# Altium PCB dolinepcb.PcbDoc
Units mil, origin at the board's own origin, x right, y up, seen from the top; angles counter-clockwise.
Board outline 3070 x 3025 mil, 2 copper layers (Top Layer, Bottom Layer); 28 components, 37 nets, 131 pads, 4 vias.
Unrouted connection lines stored in the file: 2.
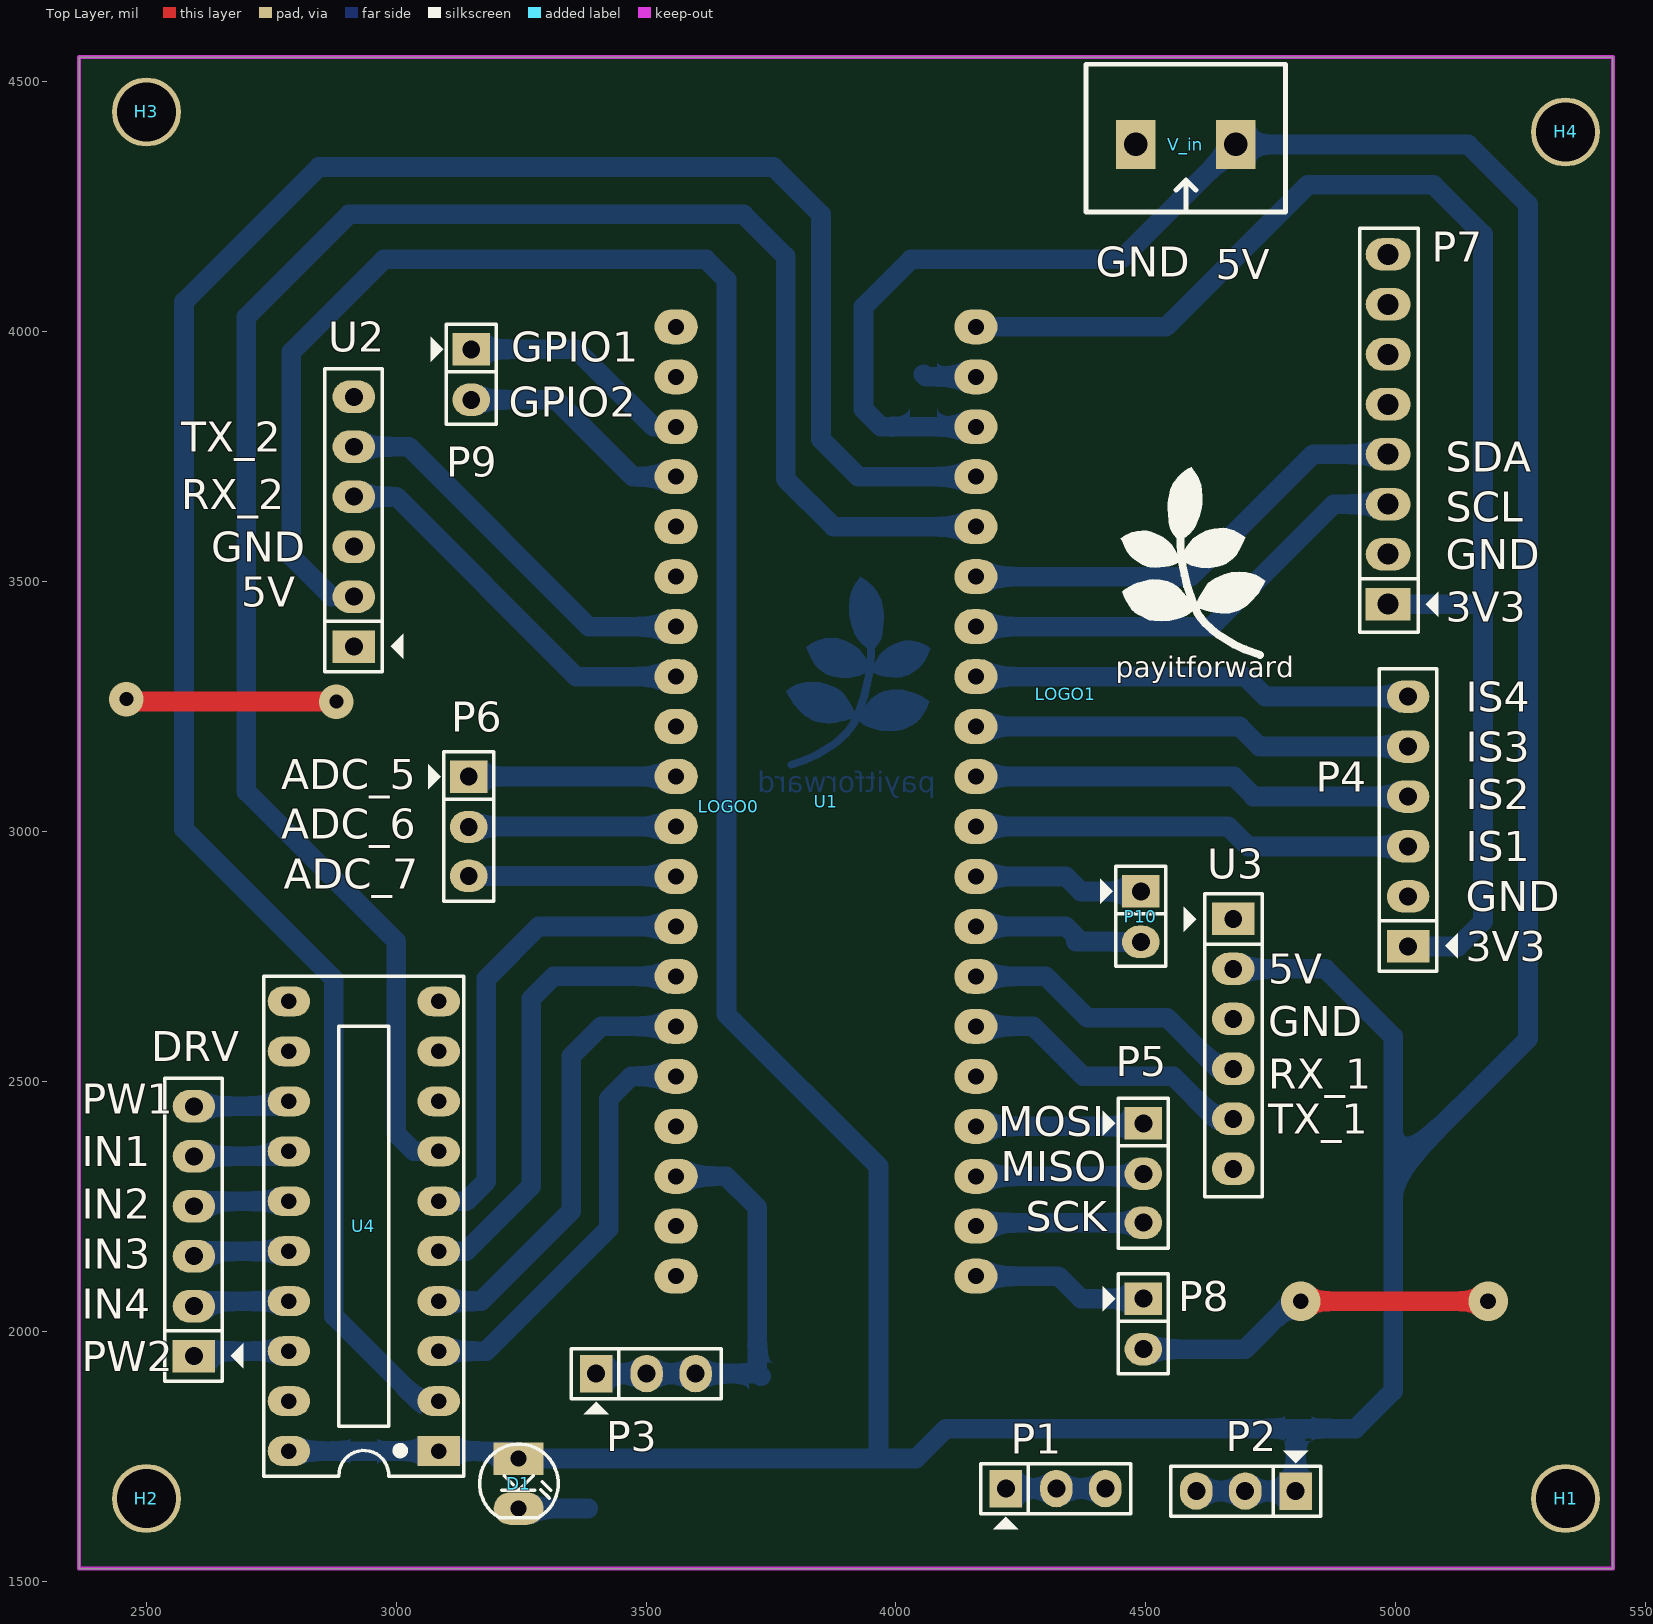
[diagram p0: Top Layer view]
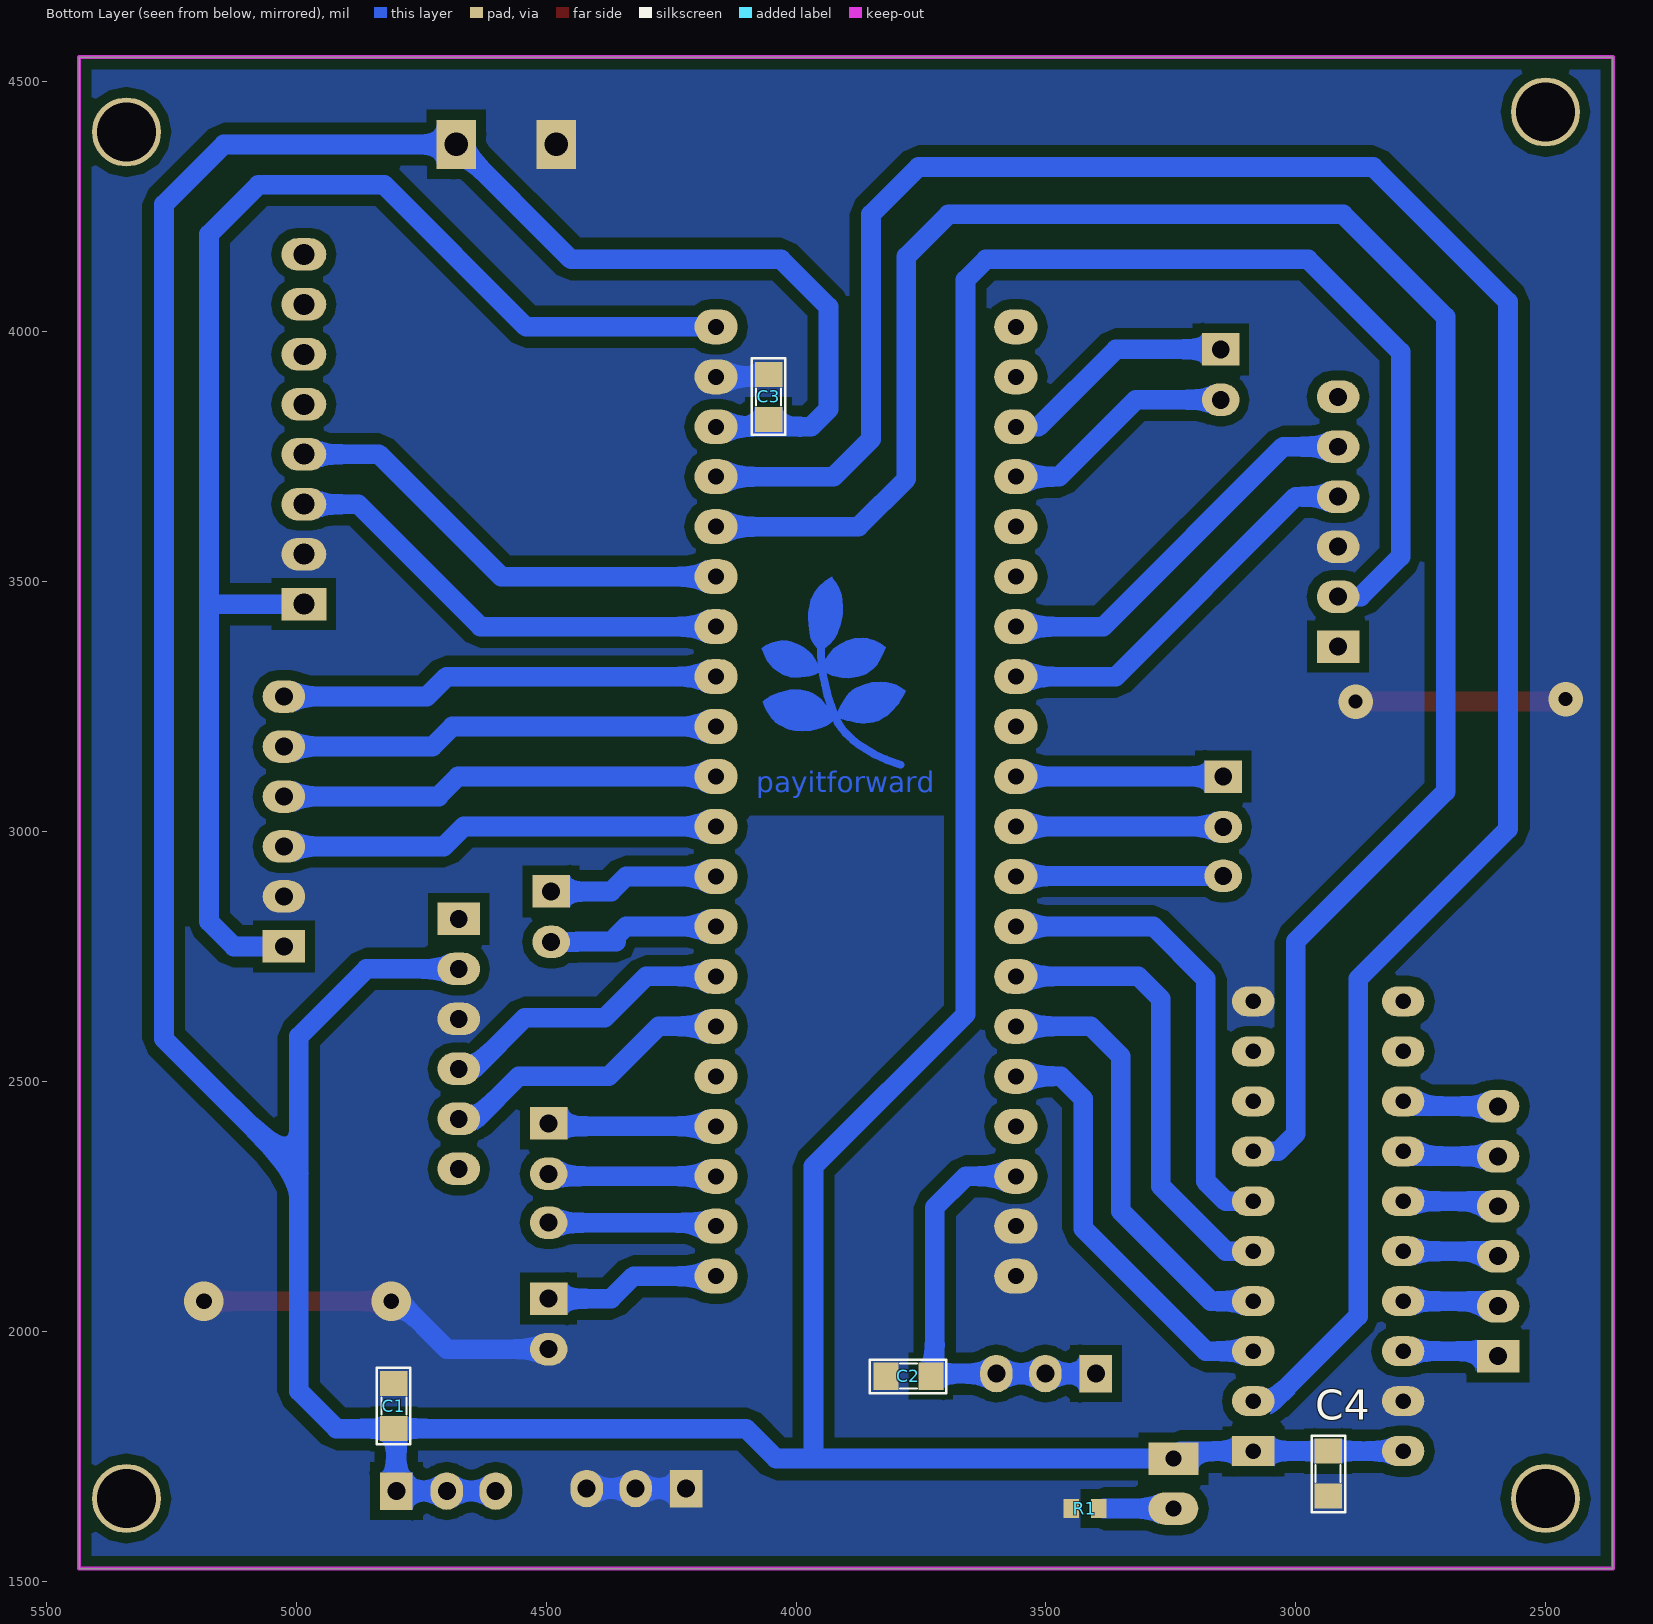
[diagram p1: Bottom Layer view, seen from below]
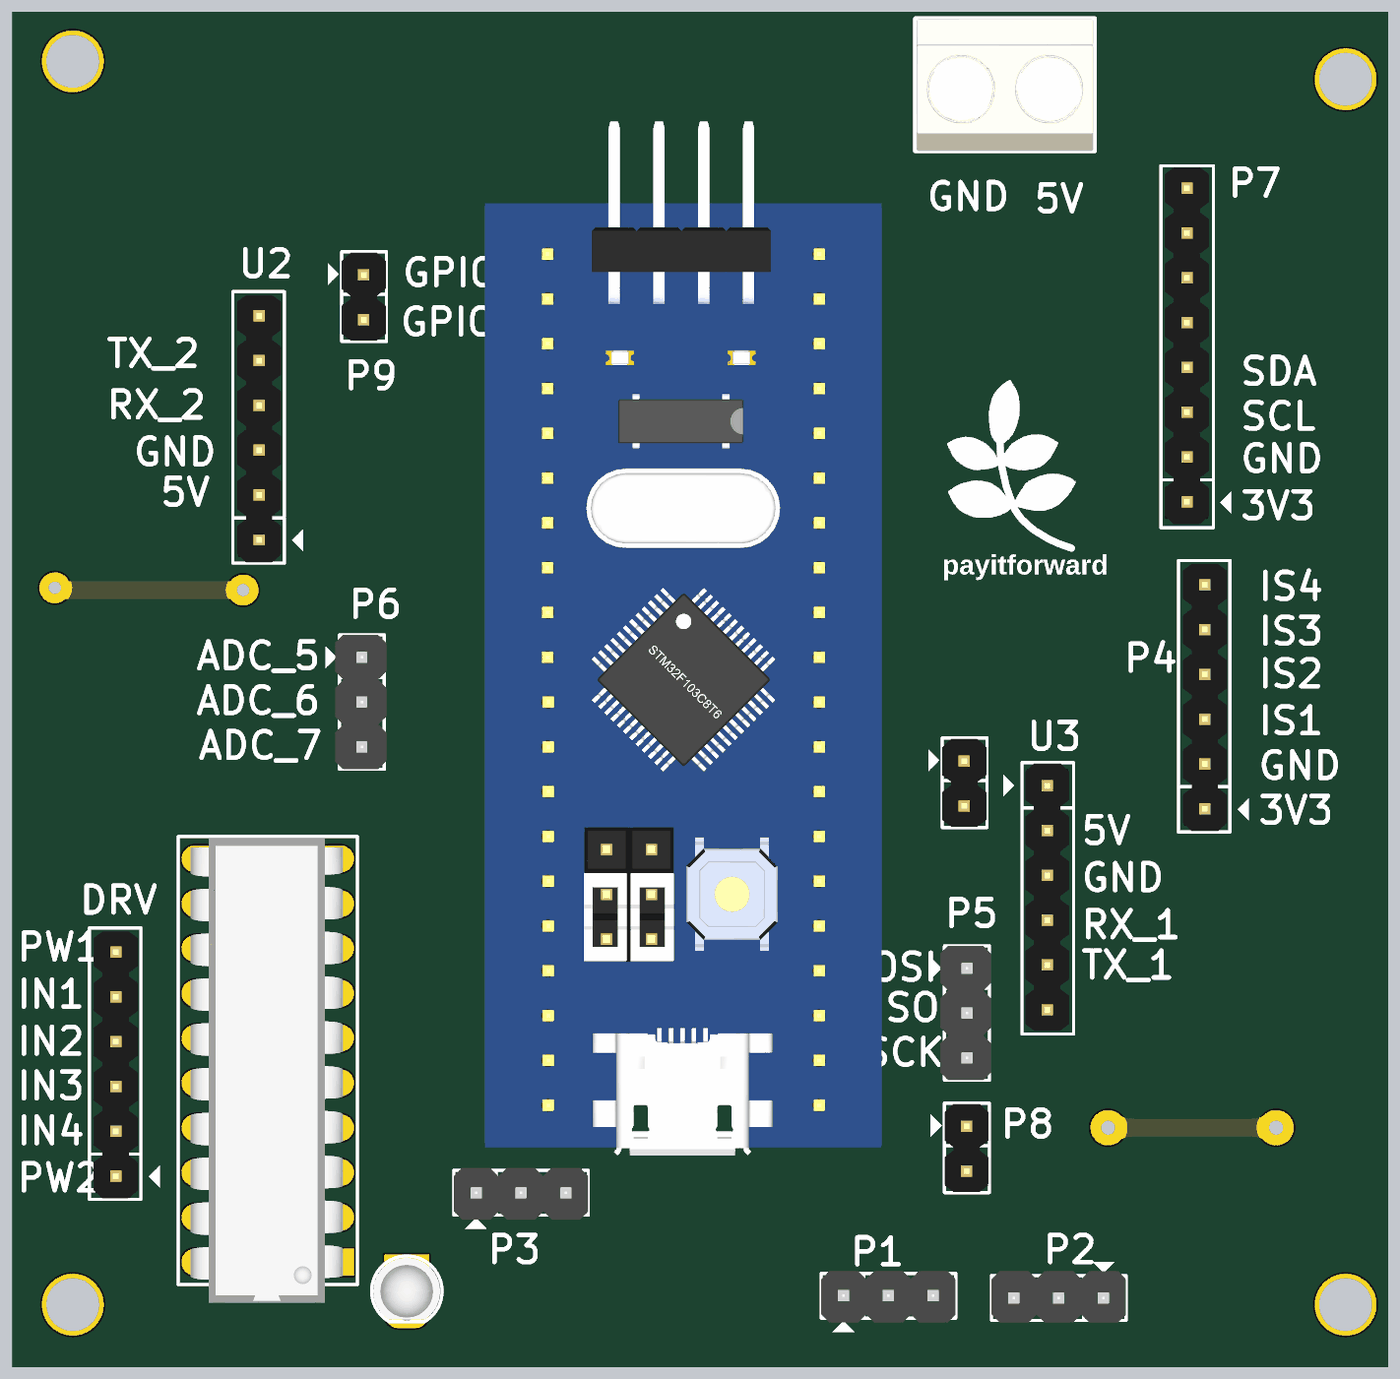
[diagram p2: 3D render of the assembled board from above, using the file's embedded part models]
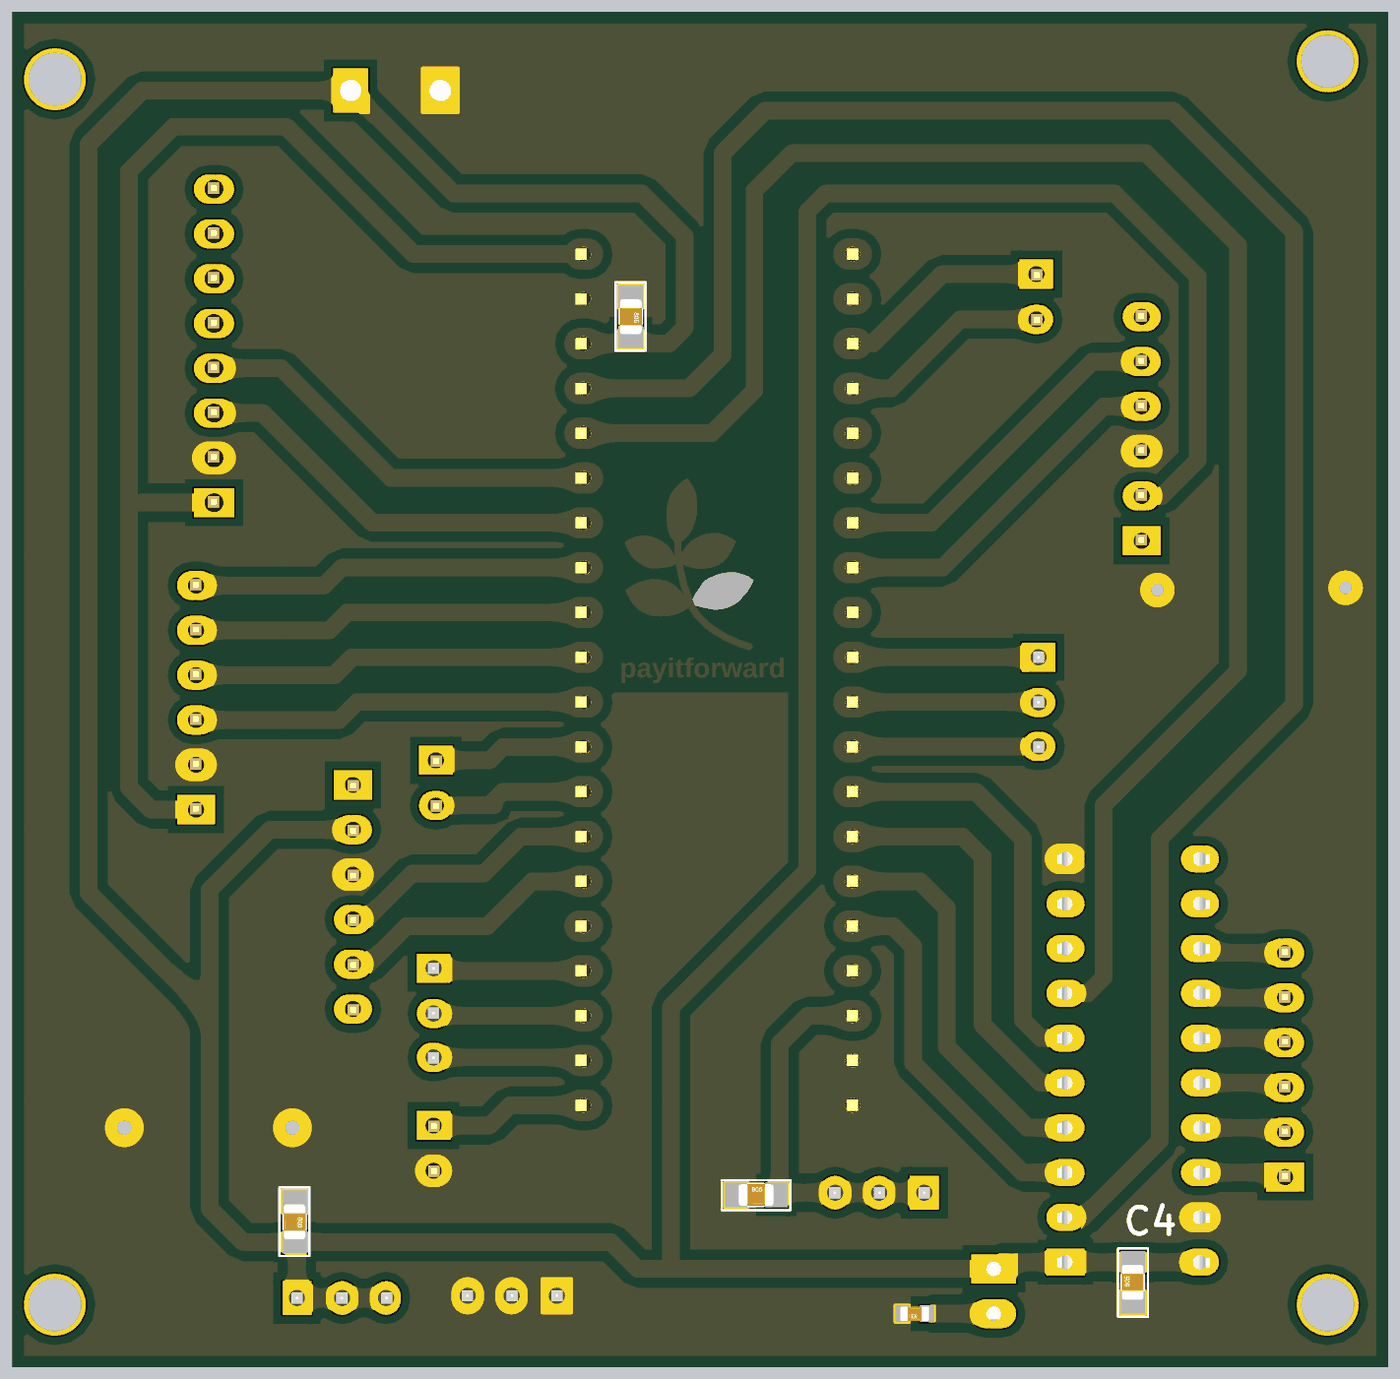
[diagram p3: 3D render of the assembled board from below, using the file's embedded part models]

## Layer stack, top to bottom
Top Solder: solder mask 0.4, Solder Resist, Dk 3.5
Top Layer: signal copper 1.4
Dielectric 1: dielectric 12.6, FR-4, Dk 4.8
Bottom Layer: signal copper 1.4
Bottom Solder: solder mask 0.4, Solder Resist, Dk 3.5

## Board outline
2365,2885 2365,4550 5435,4550 5435,1525 2365,1525

## Design rules (kind name [scope] priority, off if disabled: settings)
Clearance [All] p1: gap=20 ignorepadtopadclearanceinfootprint=FALSE
PolygonConnect [All] p1: connectstyle=Direct reliefconductorwidth=10 reliefentries=4 polygonreliefangle="90 Angle" airgapwidth=10
RoutingVias [All] p1: holewidth=28 width=150 viastyle="Through Hole" minholewidth=28 minwidth=50 maxholewidth=28 maxwidth=200
SolderMaskExpansion [All] p1: expansion=4
Width [All] p1: maxlimit=50 minlimit=10 preferedwidth=20
30 further rules are at their usual default settings.

## Components (designator, comment, footprint, x,y, rotation, side; value= is the part's Value field where it differs from the comment)
C1 "Cap Non-Pol SMD" CAP-SM-0805 4805,1895 r270 bottom value=100uF
C2 "Cap Non-Pol SMD" CAP-SM-0805 3820,1910 r180 bottom value=100nF
C3 "Cap Non-Pol SMD" CAP-SM-0805 4055,3915 r270 bottom value=100nF
C4 "Cap Non-Pol SMD" CAP-SM-0805 2935,1670 r90 bottom value=100pF
D1 "LED" LED-3mm 3245,1745 r270 top
DRV "Header 6" JP6 2595,1950 r90 top (schematic designator PWM)
H1 "Hole" "LO KHOAN 3MM" 5340,1665 r0 top
H2 "Hole" "LO KHOAN 3MM" 2500,1665 r0 top
H3 "Hole" "LO KHOAN 3MM" 2500,4440 r0 top
H4 "Hole" "LO KHOAN 3MM" 5340,4400 r0 top
LOGO0 "LOGO PIF" "PIF LOGO BOTTOM LAYER" 3665,3050 r0 top
LOGO1 "LOGO PIF" "PIF LOGO TOP OVERLAY" 4340,3275 r0 top
P1 "Header 3" JP3 4320,1685 r0 top
P2 "Header 3" JP3 4700,1680 r180 top
P3 "Header 3" JP3 3500,1915 r0 top
P4 "Header 6" JP6 5025,2770 r90 top
P5 "Header 3" JP3 4495,2316 r270 top
P6 "Header 3" JP3 3145,3010 r270 top
P7 "Header 8" JP8 4985,3455 r90 top
P8 "Header 2" JP2 4495,2065 r270 top
P9 "Header 2" JP2 3150,3965 r270 top
P10 "Header 2" JP2 4490,2880 r270 top
R1 "RESISTOR SMD" RES-SM-0603 3394.71,1645 r0 bottom value=1K
U1 "STM32F103 BLUEPILL" "STM32F103 Bluepill" 3560,2110 r0 top
U2 "UART" JP6 2915,3370 r90 top
U3 "HC 05" JP6 4675,2825 r270 top
U4 "74HC245" DIP20/W0.3 3085,1760 r90 top
V_in "Domino 2" "DOMINO 2- 5mm" 4580,4375 r180 top

## Footprints (in the part's own frame and the unit in brackets; to place one, negate y for a bottom-side part, rotate by r counter-clockwise, add the part's x,y. Pads: shape width x height; smd on the part's side, far side on the other; paste and mask are expansions set on the pad)
CAP-SM-0805 [mil]
  rect 50x55 smd: 1(0,0) 2(90,0)
  silkscreen extent -32,-34 121,33, body extent 6,-25 84,25, height 31
DIP20/W0.3 [mil] "DIP 20, 20 PIN, W 300mil, Pin to pin 100mil"
  rect 60x85 hole 31: 1(0,0)
  oval 60x85 hole 31: 2(100,0) 3(200,0) 4(300,0) 5(400,0) 6(500,0) 7(600,0) 8(700,0) 9(800,0) 10(900,0) 11(900,300) 12(800,300) 13(700,300) 14(600,300) 15(500,300) 16(400,300) 17(300,300) 18(200,300) 19(100,300) 20(0,300)
  silkscreen extent -50,-50 950,350, body extent -91,-18 945,322, height 155
"DOMINO 2- 5mm" [mm]
  rect 2x2.5 hole 1.2: 1(-2.54,0) 2(2.54,0)
  silkscreen extent -5.08,-4.08 5.08,3.43, body extent -5,-4.07 5,3.43, height 10
JP2 [mil]
  rect 65x75 hole 36: 1(0,0)
  oval 65x75 hole 36: 2(101,0)
  silkscreen extent -50,-81 150,50, body extent -48,-50 148,48, height 323
JP3 [mil] "Jumper 3"
  rect 65x75 hole 36: 1(-100,0)
  oval 65x75 hole 36: 2(1,0) 3(99,0)
  silkscreen extent -150,-81 150,50, body extent -150,-60 150,55, height 355
JP6 [mil] "JP6"
  rect 65x85 hole 36: 1(0,0)
  oval 65x85 hole 36: 2(100,0) 3(200,0) 4(300,0) 5(400,0) 6(500,0)
  silkscreen extent -50,-99 556,58, body extent -48,-50 548,48, height 323
JP8 [mil] "JP8"
  rect 65x90 hole 42: 1(0,0)
  oval 65x90 hole 42: 2(100,0) 3(200,0) 4(300,0) 5(400,0) 6(500,0) 7(600,0) 8(700,0)
  silkscreen extent -56,-100 752,57, body extent -48,-50 748,48, height 323
LED-3mm [mil] "LED 2 PIN, 3ly Only colour"
  rect 65x100 hole 32: 1(0,0)
  oval 65x100 hole 32: 2(100,0)
  silkscreen extent -29,-78 118,79, body extent -25,-75 113,75, height 217
"LO KHOAN 3MM" [mil]
  round 138 hole 118.1: 1(0,0)
"PIF LOGO BOTTOM LAYER" [mil]
  Bottom Layer region: 262.8,459.42 263.04,459.41 270.11,456.08 270.14,456.05 270.18,456.04 276.01,452.27 276.04,452.23 276.09,452.21 284.03,445.14 284.03,445.14 284.04,445.13 290.27,439.3 290.29,439.25 290.34,439.22 296.61,430.88 296.61,430.88 296.62,430.88 299.95,426.28 299.97,426.21 300.02,426.16 302.92,419.49 302.92,419.48 302.92,419.48 305.02,414.48 305.02,414.42 305.06,414.37 307.56,403.14 307.56,403.14 307.56,403.13 309.23,395.2 309.22,395.18 309.23,395.16 310.47,386.42 310.46,386.38 310.47,386.33 310.47,377.17 310.47,377.15 310.47,377.13 309.64,364.19 309.64,364.19 309.64,364.18 308.81,353.35 308.79,353.32 308.8,353.29 307.96,348.29 307.96,348.29 307.96,348.28 306.3,339.55 306.28,339.52 306.28,339.48 305.25,336.05 305.22,336.02 305.22,335.98 302.42,329.58 302.37,329.53 302.36,329.47 298.76,324.27 298.73,324.25 298.72,324.21 293.12,317.81 293.05,317.78 293.02,317.72 291.68,316.72 291.74,313.41 291.7,313.32 291.72,313.23 291.62,313.1 291.56,312.96 291.47,312.92 291.41,312.84 291.26,312.82 291.11,312.76 291.02,312.8 290.93,312.78 280.49,315.72 280.42,315.77 280.33,315.79 274.93,319.12 274.91,319.15 274.87,319.16 265.27,326.66 265.23,326.73 265.16,326.78 256.83,337.61 256.81,337.66 256.77,337.69 253.04,344.35 253.04,344.4 253,344.44 249.23,354.44 246.34,361.94 246.34,361.98 246.31,362.01 244.21,370.34 244.21,370.34 244.21,370.35 242.15,378.68 242.15,378.74 242.13,378.8 241.69,386.3 241.7,386.32 241.69,386.33 241.69,402.17 241.7,402.19 241.7,402.22 242.53,411.79 242.53,411.8 242.53,411.8 243.8,423.07 243.84,423.14 243.83,423.22 246.73,431.12 246.74,431.13 246.74,431.13 249.67,438.63 249.71,438.68 249.72,438.73 255.55,448.33 255.57,448.34 255.57,448.36 260.11,454.99 262.19,459.12 262.37,459.28 262.55,459.44 262.56,459.44 262.57,459.44
  Bottom Layer region: 166.34,249.76 166.38,249.77 183.45,248.51 183.51,248.48 183.57,248.48 196.91,244.75 196.94,244.72 196.98,244.72 214.91,237.22 214.94,237.19 214.98,237.19 223.72,232.19 223.76,232.13 223.83,232.1 228.83,227.5 228.86,227.44 228.92,227.41 233.09,221.57 233.09,221.56 233.1,221.56 238.1,214.06 238.1,214.05 238.1,214.05 246.44,201.15 246.44,201.11 246.47,201.09 248.97,196.09 251.91,190.25 251.92,190.1 251.97,189.97 251.97,188.3 251.93,188.19 251.93,188.06 247.03,175.73 246.99,175.69 246.98,175.63 246.92,175.59 246.89,175.51 246.77,175.47 246.69,175.38 246.63,175.38 246.58,175.34 239,173.52 233.59,171.85 233.56,171.86 233.53,171.84 225.63,170.17 225.63,170.17 225.62,170.17 214.79,168.07 214.78,168.07 214.78,168.07 205.18,166.4 205.12,166.41 205.07,166.39 195.9,166.39 195.87,166.4 195.84,166.4 186.68,167.23 186.63,167.25 186.59,167.24 179.52,168.91 179.5,168.92 179.49,168.92 169.49,171.85 169.43,171.9 169.36,171.91 158.09,178.14 158.08,178.16 158.05,178.16 152.22,181.93 152.18,181.99 152.11,182.02 140.44,194.09 140.44,194.09 140.43,194.09 133.37,201.59 133.36,201.61 133.34,201.62 128.74,207.05 128.72,207.12 128.67,207.16 125.34,213.39 118.68,225.05 118.68,225.06 118.67,225.07 115.33,231.33 115.31,231.55 115.27,231.75 115.29,231.78 115.29,231.82 115.42,231.99 115.54,232.16 127.21,240.06 127.27,240.08 127.31,240.12 134.81,243.45 134.85,243.45 134.88,243.48 144.48,246.41 144.49,246.41 144.49,246.42 153.22,248.92 153.29,248.91 153.36,248.94 166.29,249.77
  Bottom Layer region: 362.66,332.28 362.74,332.3 372.74,330.63 372.76,330.62 372.78,330.62 381.94,328.52 381.99,328.49 382.06,328.49 388.72,325.59 388.72,325.59 388.72,325.59 395.39,322.65 395.44,322.61 395.5,322.59 403.83,316.76 403.94,316.59 404.07,316.44 404.07,316.39 404.1,316.34 404.05,316.15 404.04,315.95 402.38,312.64 399.89,306.43 399.88,306.41 399.87,306.38 396.14,298.88 396.14,298.88 396.14,298.88 391.54,289.71 391.49,289.67 391.47,289.6 386.47,283.33 386.46,283.33 386.45,283.32 381.45,277.48 381.39,277.45 381.35,277.38 373.45,271.55 373.43,271.55 373.41,271.53 361.75,264.03 361.68,264.02 361.62,263.97 351.62,260.23 351.6,260.23 351.59,260.22 346.15,258.55 346.08,258.56 346.02,258.53 335.62,257.7 335.56,257.71 335.5,257.7 315.9,259.76 315.89,259.77 315.87,259.77 307.14,261.03 307.11,261.05 307.07,261.05 300.8,262.71 300.79,262.73 300.76,262.73 295.76,264.39 295.71,264.44 295.64,264.45 288.57,268.62 288.52,268.68 288.45,268.71 288.43,268.76 288.38,268.79 288.35,268.91 288.28,269.01 288.29,269.09 288.26,269.17 288.28,269.22 288.27,269.27 290.33,282.17 290.39,282.26 290.4,282.36 297.5,296.13 297.53,296.15 297.53,296.19 302.53,303.69 302.59,303.73 302.61,303.79 309.61,310.79 309.65,310.8 309.66,310.83 318.5,318 318.53,318.01 318.54,318.03 319.53,318.7 319.54,318.7 319.55,318.71 321.58,319.95 321.6,319.95 321.61,319.97 323.7,321.11 323.71,321.11 323.72,321.12 325.86,322.17 325.88,322.17 325.89,322.18 326.97,322.65 334.03,325.98 334.04,325.98 334.06,325.99 343.22,329.76 343.28,329.76 343.34,329.79 351.27,331.46 351.31,331.45 351.35,331.47 362.59,332.31
  Bottom Layer region: 340.34,234.82 340.4,234.84 348.33,234 348.38,233.98 348.44,233.98 355.93,231.92 370.92,228.15 370.96,228.13 371.01,228.13 376.01,226.06 376.03,226.04 376.06,226.03 387.3,220.2 387.32,220.17 387.36,220.17 397.36,213.5 397.37,213.47 397.4,213.47 401.57,210.13 401.64,210 401.75,209.89 401.75,209.79 401.8,209.7 401.76,209.56 401.76,209.4 398.86,201.9 398.84,201.87 398.83,201.84 394.23,193.07 394.23,193.07 394.23,193.06 390.9,186.83 390.87,186.81 390.86,186.77 382.12,174.27 382.08,174.23 382.05,174.18 376.22,168.35 376.16,168.32 376.13,168.27 369.46,163.67 369.42,163.66 369.39,163.63 362.72,160.29 362.71,160.29 362.71,160.29 353.11,155.72 353.09,155.72 353.09,155.71 347.25,153.21 347.17,153.21 347.11,153.17 337.11,151.5 337.06,151.51 337.02,151.49 322.02,151.06 321.99,151.07 321.97,151.06 306.13,151.89 306.09,151.92 306.04,151.91 293.97,154.41 293.95,154.42 293.92,154.42 283.92,157.35 283.88,157.38 283.83,157.38 273.83,161.95 273.81,161.98 273.77,161.99 266.27,166.59 266.24,166.62 266.21,166.63 260.78,170.79 260.76,170.83 260.71,170.85 260.68,170.94 260.6,171.01 260.59,171.12 260.53,171.22 260.54,171.26 260.53,171.3 260.57,171.39 260.56,171.49 268.49,196.49 268.63,196.66 268.74,196.83 271.17,198.45 280.28,209.21 284.44,214.21 284.49,214.24 284.51,214.28 290.75,219.68 290.79,219.7 290.82,219.74 301.26,226.41 301.3,226.41 301.32,226.44 310.06,230.61 310.14,230.62 310.21,230.66 325.21,233.6 325.25,233.59 325.28,233.6 340.28,234.84
  Bottom Layer region: 218.01,336.37 218.07,336.34 218.14,336.35 227.3,333.85 227.31,333.84 227.33,333.84 233.99,331.74 234.04,331.71 234.1,331.7 241.2,327.97 241.27,327.89 247.43,324.63 247.45,324.61 247.48,324.6 259.58,316.67 259.65,316.58 259.74,316.53 271.41,301.53 271.42,301.49 271.45,301.47 279.35,288.57 279.35,288.56 279.35,288.56 281.85,284.4 281.88,284.18 281.93,283.97 279.87,270.2 279.83,270.15 279.84,270.08 279.74,269.98 279.69,269.85 279.64,269.83 279.61,269.78 279.55,269.77 279.51,269.72 262.84,261.82 262.77,261.82 262.71,261.77 243.94,257.61 243.88,257.62 243.82,257.59 229.25,257.16 229.2,257.18 229.14,257.17 211.64,259.67 211.6,259.69 211.55,259.69 200.29,263.02 200.26,263.04 200.22,263.04 193.15,265.98 193.1,266.03 193.02,266.05 188.02,269.79 188.01,269.79 188,269.8 180.07,276.06 180.05,276.11 180,276.13 173.77,282.8 173.74,282.87 173.68,282.91 163.25,300.81 163.24,300.84 163.22,300.86 158.22,311.29 158.22,311.31 158.21,311.32 155.31,318.39 155.31,318.58 155.27,318.76 155.31,318.82 155.31,318.88 155.44,319.01 155.55,319.17 166.38,326.27 166.42,326.28 166.44,326.3 178.51,332.54 178.56,332.54 178.6,332.57 186.1,335.07 186.11,335.07 186.12,335.08 191.96,336.75 192.01,336.74 192.06,336.77 199.56,337.6 199.62,337.59 199.68,337.61
  Bottom Layer lines w15.75: 126.17,83.57 155.2,93.9 177.5,104.07 210,124.07 221.67,133.63 237.07,148.23 244.17,157.4 252.07,169.07 259.17,186.13 271.67,221.57 272.9,226.97 276.67,243.63 280.4,260.73 282.67,270.73 283.5,281.17 284.33,291.57 284.77,300.73 286,334.83
"PIF LOGO TOP OVERLAY" [mil]
  silkscreen extent 110,79 399,454
RES-SM-0603 [mm]
  rect 0.8x0.95 smd: 1(-0.014,0) 2(1.386,0)
  body extent -0.11,-0.4 1.49,0.4, height 0.3
"STM32F103 Bluepill" [mil]
  oval 86.61x70 hole 32: 1(0,1900) 2(0,1800) 3(0,1700) 4(0,1600) 5(0,1500) 6(0,1400) 7(0,1300) 8(0,1200) 9(0,1100) 10(0,1000) 11(0,900) 12(0,800) 13(0,700) 14(0,600) 15(0,500) 16(0,400) 17(0,300) 18(0,200) 19(0,100) 20(0,0) 21(600,0) 22(600,100) 23(600,200) 24(600,300) 25(600,400) 26(600,500) 27(600,600) 28(600,700) 29(600,800) 30(600,900) 31(600,1000) 32(600,1100) 33(600,1200) 34(600,1300) 35(600,1400) 36(600,1500) 37(600,1600) 38(600,1700) 39(600,1800) 40(600,1900)
  body extent -141,-113 745,2196, height 571

## Part data
C1 C2 C3 C4: "Capacitor"
DRV P4: "Header, 6-Pin", LatestRevisionDate=17-Jul-2002, LatestRevisionNote="Re-released for DXP Platform.", Publisher="Altium Limited"
H1 H2 H3 H4: "Hole 3mm"
LOGO0 LOGO1: library part "LOGO PIF_2"
P1 P2 P3 P5 P6: "Header, 3-Pin", LatestRevisionDate=17-Jul-2002, LatestRevisionNote="Re-released for DXP Platform.", Publisher="Altium Limited"
P7: "Header, 8-Pin", LatestRevisionDate=17-Jul-2002, LatestRevisionNote="Re-released for DXP Platform.", Publisher="Altium Limited"
P8 P9 P10: "Header, 2-Pin", LatestRevisionDate=17-Jul-2002, LatestRevisionNote="Re-released for DXP Platform.", Publisher="Altium Limited"
R1: "Resistor"
U2: library part "HC 05"
U4: "Octal bus tranceiver"
V_in: "Domino, 2-Pin", LatestRevisionDate=17-Jul-2002, LatestRevisionNote="Re-released for DXP Platform.", Publisher="Altium Limited"

## Via types
v1: diameter 69, hole 28, Top Layer to Bottom Layer, 2 vias
v2: diameter 78.74, hole 31.5, Top Layer to Bottom Layer, 2 vias

## Nets (pads, with @x,y where several pads share a name; then routed paths per layer and width w, separated by ;. In a path a pad name is that pad's centre, name@x,y a point inside that pad or via, vN(x,y) a via of type N, cw(c..) or ccw(c..) an arc to the next point about the centre after c; other vN are vias at no path point)
3V3: C2.2 P3.1 P3.2 P3.3 P4.1 P7.1 U1.18 U1.40 | length 3738.5
  Bottom Layer w39.37: P3.1 P3.2 P3.3 C2.2@3725,1915 ; U1.18 3660,2310 3722.5,2247.5 3722.5,1917.5 C2.2@3725,1915 ; C2.2 C2.2@3725,1915 ; U1.40 4540,4010 4824.13,4294.13 5075.87,4294.13 5175,4195 5175,2820 5125,2770 P4.1 ; P7.1 5150,3455
5V: C1.2 C3.2 C4.2 D1.1 P2.1 P2.2 P2.3 U1.38 U2.2 U3.2 U4.1 U4.20 V_in.1 | length 11712.5
  Bottom Layer w39.37: U4.20 C4.2 U4.1 3230,1760 D1.1 3965,1745 ; U2.2 2870,3470 2790,3550 2790,3960 2975,4145 3620,4145 3660.95,4104.05 3660.95,2634.05 3965,2330 3965,1745 ; U1.38 3970,3810 3935,3845 3935,4050 4030,4145 4450,4145 V_in.1 5145,4375 5265,4255 5265,2585 4995,2315 ; P2.3 P2.2 P2.1 4800,1800 C1.2 ; U3.2 4860,2725 4995,2590 4995,2315 ; 3965,1745 4040,1745 4100,1805 C1.2 ; C1.2 4920,1805 4995,1880 4995,2315
ADC5: P6.1 U1.10 | length 415
  Bottom Layer w39.37: P6.1 U1.10
ADC6: P6.2 U1.11 | length 415.4
  Bottom Layer w39.37: P6.2 3146,3010 U1.11
ADC7: P6.3 U1.12 | length 415.4
  Bottom Layer w39.37: P6.3 3559,2911 U1.12
GND: C1.1 C2.1 C3.1 C4.1 P1.1 P1.2 P1.3 P4.2 P7.2 P8.2 R1.2 U1.19 U1.20 U1.39 U2.3 U3.3 U4.10 U4.19 V_in.2 | length 1457.9
  Top Layer w39.37: v1(2460,3265) 2465,3260 v1(2880,3260) ; v2(4810,2060) v2(5185,2060)
  Bottom Layer w39.37: C3.1 4060,3910 U1.39 ; P1.1 P1.2 P1.3 ; P8.2 4699,1964 4795,2060 v2(4810,2060)
GPIO1: P9.1 U1.3 | length 474.2
  Bottom Layer w39.37: P9.1 3360,3965 3515,3810 U1.3
GPIO2: P9.2 U1.4 | length 473.8
  Bottom Layer w39.37: P9.2 3319.58,3864 3473.58,3710 U1.4
GPIO3: P10.1 U1.29 | length 342.4
  Bottom Layer w39.37: U1.29 4340,2910 4370,2880 P10.1
GPIO4: P10.2 U1.28 | length 348.7
  Bottom Layer w39.37: U1.28 4340,2810 4360,2790 4360,2780 4438,2780 4439,2779 P10.2
GPIO5: P8.1 U1.21 | length 353.6
  Bottom Layer w39.37: U1.21 4325,2110 4370,2065 P8.1
IN1: U1.16 U4.3 | length 855.1
  Bottom Layer w39.37: U4.3 3180,1960 3425,2205 3425,2465 3470,2510 U1.16
IN2: U1.15 U4.4 | length 884.4
  Bottom Layer w39.37: U4.4 3170,2060 3350,2240 3350,2550 3410,2610 U1.15
IN3: U1.14 U4.5 | length 922.5
  Bottom Layer w39.37: U4.5 3140,2160 3270,2290 3270,2665 3315,2710 U1.14
IN4: U1.13 U4.6 | length 940.1
  Bottom Layer w39.37: U4.6 3140,2260 3180,2300 3180,2705 3285,2810 U1.13
IS1: P4.3 U1.30 | length 881.6
  Bottom Layer w39.37: U1.30 4665,3010 4705,2970 P4.3
IS2: P4.4 U1.31 | length 882.9
  Bottom Layer w39.37: U1.31 4676.36,3110 4715.68,3070.68 4715,3070 P4.4
IS3: P4.5 U1.32 | length 881.6
  Bottom Layer w39.37: U1.32 4687.71,3210 4727.71,3170 P4.5
IS4: P4.6 U1.33 | length 881.6
  Bottom Layer w39.37: U1.33 4699.07,3310 4739.07,3270 P4.6
MCU_RX1: U1.27 U3.4 | length 591.6
  Bottom Layer w39.37: U1.27 4300,2710 4382.5,2627.5 4542.5,2627.5 4645,2525 U3.4
MCU_RX2: U1.8 U2.4 | length 794.1
  Bottom Layer w39.37: U2.4 3000,3670 3360,3310 U1.8
MCU_TX1: U1.26 U3.5 | length 591.6
  Bottom Layer w39.37: U1.26 4275,2610 4375,2510 4555,2510 4640,2425 U3.5
MCU_TX2: U1.7 U2.5 | length 794.1
  Bottom Layer w39.37: U2.5 3025,3770 3385,3410 U1.7
NetD1_2: D1.2 R1.1 | length 139.4
  Bottom Layer w39.37: D1.2 R1.1@3384.44,1645
NetDRV_1: DRV.1 U4.18 | length 194.1
  Bottom Layer w39.37: DRV.1 2605,1960 U4.18
NetDRV_2: DRV.2 U4.17 | length 194.1
  Bottom Layer w39.37: DRV.2 2605,2060 U4.17
NetDRV_3: DRV.3 U4.16 | length 194.1
  Bottom Layer w39.37: DRV.3 2605,2160 U4.16
NetDRV_4: DRV.4 U4.15 | length 194.1
  Bottom Layer w39.37: DRV.4 2605,2260 U4.15
NetDRV_5: DRV.5 U4.14 | length 194.1
  Bottom Layer w39.37: DRV.5 2775,2350 U4.14
NetDRV_6: DRV.6 U4.13 | length 194.1
  Bottom Layer w39.37: DRV.6 2775,2450 U4.13
PWM1: U1.36 U4.7 | length 3923.2
  Bottom Layer w39.37: U4.7 3035,2360 3000,2395 3000,2780 2700,3080 2700,4030 2905,4235 3695,4235 3779.13,4150.87 3779.13,3705.87 3875,3610 U1.36
PWM2: U1.37 U4.2 | length 4651.9
  Bottom Layer w39.37: U4.2 3045,1860 2875,2030 2875,2705 2575,3005 2575,4060 2845,4330 3755,4330 3850,4235 3850,3785 3925,3710 U1.37
SCL: P7.3 U1.34 | length 926.5
  Bottom Layer w39.37: U1.34 4631.42,3410 4876.42,3655 P7.3
SDA: P7.4 U1.35 | length 926.5
  Bottom Layer w39.37: U1.35 4590,3510 4835,3755 P7.4
SPI2_MISO: P5.2 U1.23 | length 337.1
  Bottom Layer w39.37: U1.23 4490,2310 P5.2
SPI2_MOSI: P5.1 U1.24 | length 337.5
  Bottom Layer w39.37: U1.24 4489,2410 P5.1
SPI2_SCK: P5.3 U1.22 | length 337.9
  Bottom Layer w39.37: U1.22 4167,2217 P5.3
pads on no net: H1.1 H2.1 H3.1 H4.1 P7.5 P7.6 P7.7 P7.8 U1.1 U1.2 U1.5 U1.6 U1.9 U1.17 U1.25 U2.1 U2.6 U3.1 U3.6 U4.8 U4.9 U4.11 U4.12
copper on no net: | length 28.3
  Bottom Layer w39.37: 2775,2550 2785,2560 ; 2775,2650 2785,2660

## Polygon pours and split planes (outlines as drawn)
GND on Bottom Layer "GND_L02_P042" (solid, remove dead copper, pour order 42): 2365,4535 2380,4550 5435,4550 5435,1525 2365,1525
GND on Bottom Layer "GND_L02_P026" (solid, pour order 26): 5670,2875
GND on Bottom Layer "GND_L02_P010" (solid, pour order 10): 2380,4550

## Keep-outs
Keep-Out Layer:
  the board outline again, w7.87

## Silkscreen, mask and mechanical layers (free items; w line width, h text height)
Top Overlay:
  text "GND" at 4400,4110 h60
  text "5V" at 4640,4105 h60
  text "GPIO1" at 3230,3940 h60
  text "GPIO2" at 3225,3830 h60
  text "TX_2" at 2570,3760 h60
  text "SDA" at 5100,3720 h60
  text "RX_2" at 2570,3645 h60
  text "SCL" at 5100,3620 h60
  text "GND" at 2629.98,3540 h60
  text "GND" at 5100,3525 h60
  text "5V" at 2689.96,3450 h60
  text "3V3" at 5100,3420 h60
  text "IS4" at 5140,3240 h60
  text "IS3" at 5140,3140 h60
  text "ADC_5" at 2770,3085 h60
  text "IS2" at 5140,3045 h60
  text "ADC_6" at 2770,2985 h60
  text "IS1" at 5140,2940 h60
  text "ADC_7" at 2775,2885 h60
  text "GND" at 5140,2840 h60
  text "3V3" at 5140,2740 h60
  text "5V" at 4745,2695 h60
  text "GND" at 4745,2590 h60
  text "RX_1" at 4745,2485 h60
  text "PW1" at 2370,2435 h60
  text "TX_1" at 4745,2395 h60
  text "MOSI" at 4205,2390 h60
  text "IN1" at 2370,2330 h60
  text "MISO" at 4210,2300 h60
  text "IN2" at 2370,2225 h60
  text "SCK" at 4259.98,2200 h60
  text "IN3" at 2370,2125 h60
  text "IN4" at 2370,2025 h60
  text "PW2" at 2370,1920 h60

## Text inside footprints (layer, text, board x,y; h text height)
LOGO0: Bottom Layer "payitforward" at 4080,3065 h70
LOGO1: Top Overlay "payitforward" at 4440,3295 h70